# Altium PCB Sheer1.PcbDoc (part 2 of 2)
Units mil, origin at the board's own origin, x right, y up, seen from the top; angles counter-clockwise.
Board outline 7637.8 x 3799.21 mil, 2 copper layers (Top Layer, Bottom Layer); 236 components, 181 nets, 723 pads, 138 vias.
Unrouted connection lines stored in the file: 215.
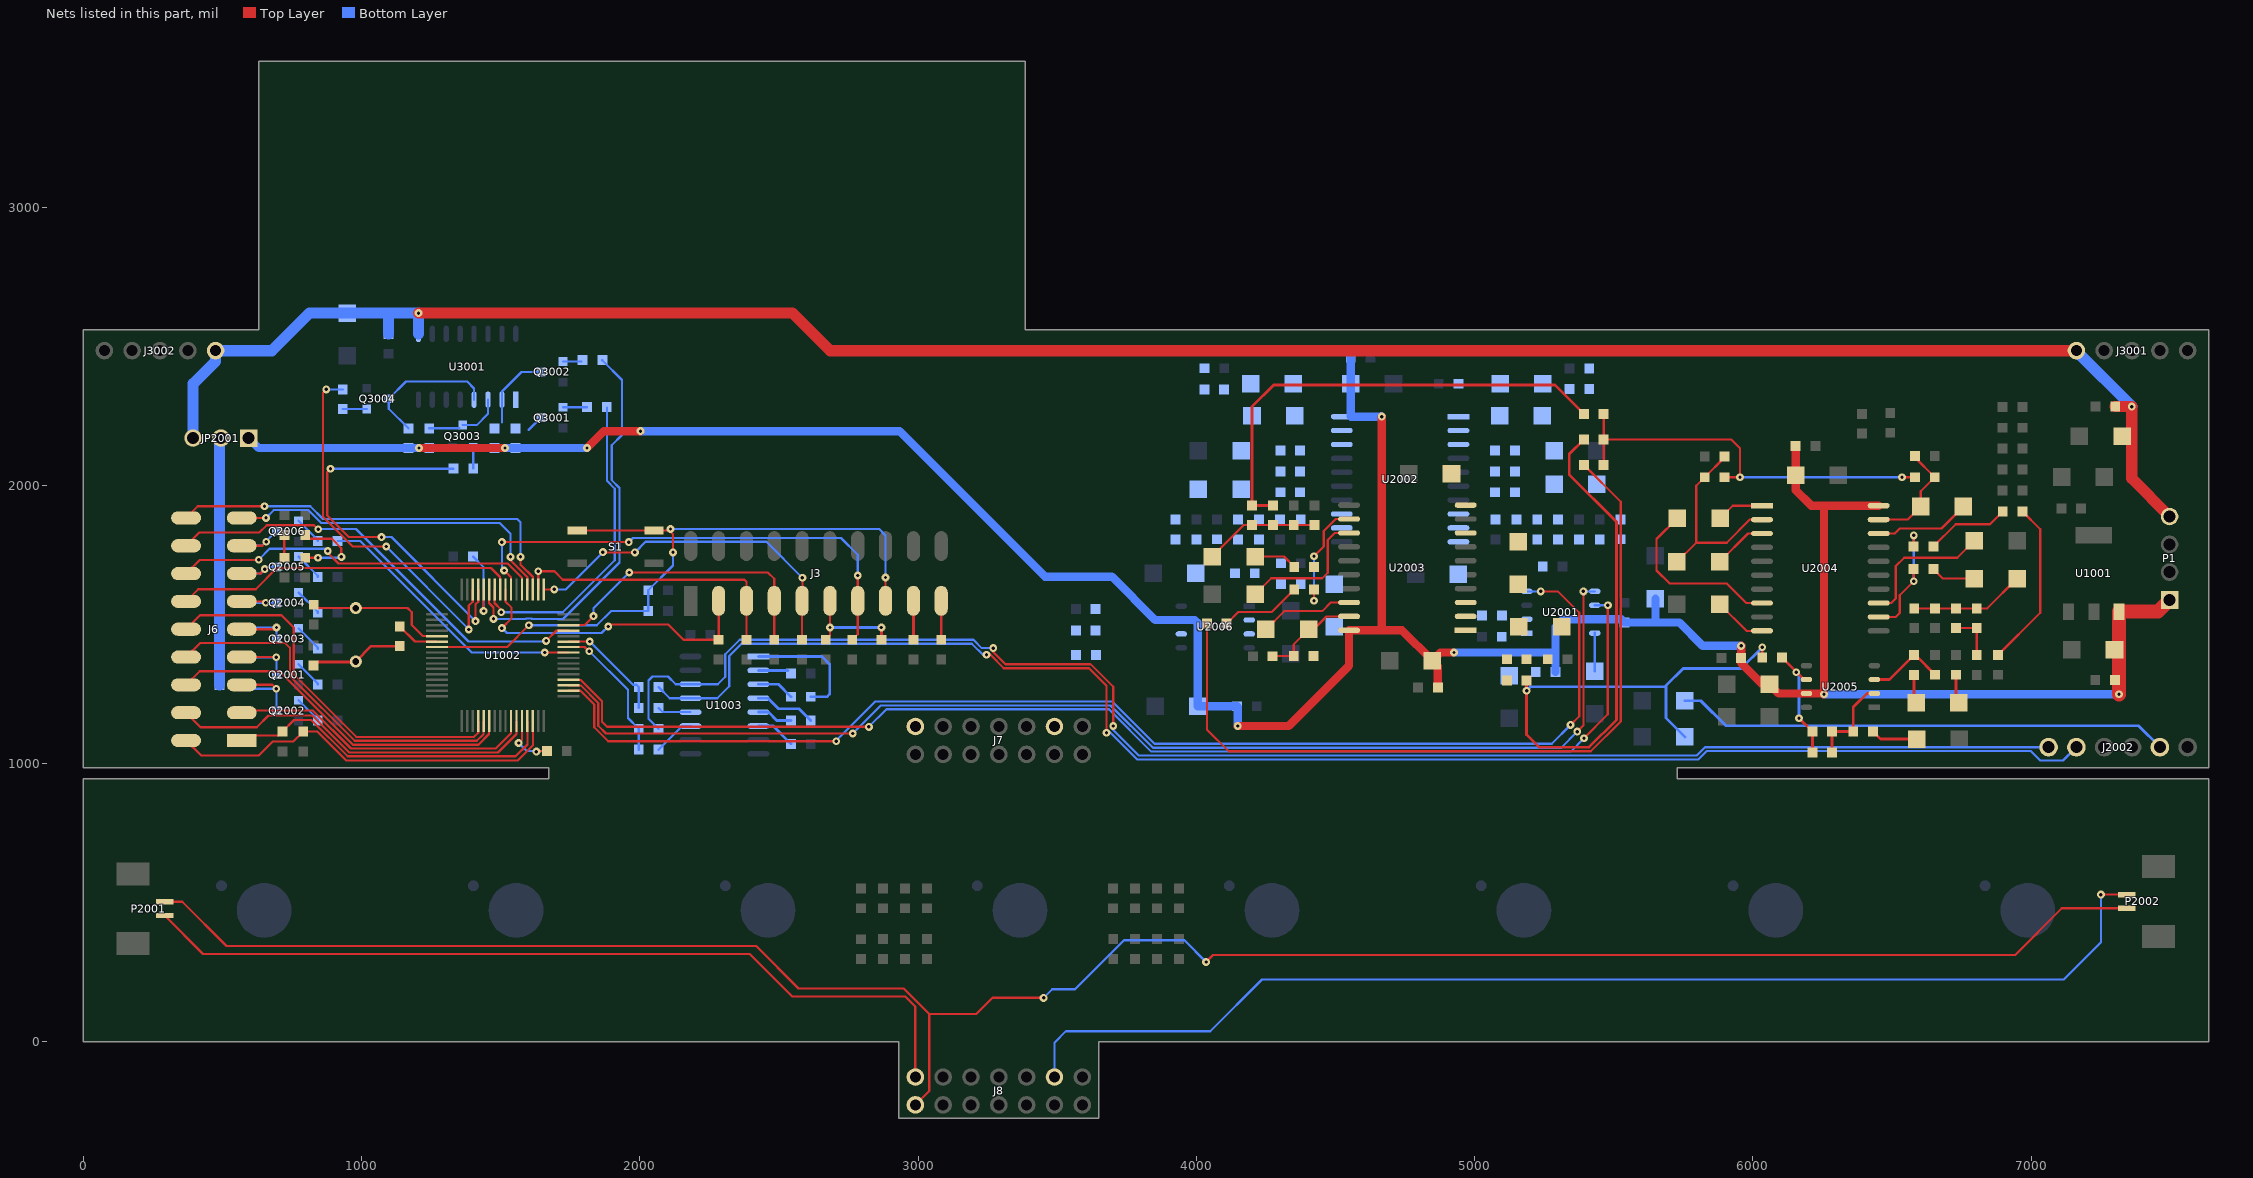
[diagram p2: the nets of this part, all layers, seen from the top]

## Via types
v1: diameter 28, hole 12, Top Layer to Bottom Layer, 130 vias
v2: diameter 19.68, hole 9.84, Top Layer to Bottom Layer, 8 vias

## Nets (pads, with @x,y where several pads share a name; then routed paths per layer and width w, separated by ;. In a path a pad name is that pad's centre, name@x,y a point inside that pad or via, vN(x,y) a via of type N, cw(c..) or ccw(c..) an arc to the next point about the centre after c; other vN are vias at no path point) (continued)
LKJ6: R2014.1 U1002.41 | length 996.5
  Top Layer w8: v1(1658.2,1399.2) U1002.41@1743.44,1399.2
  Bottom Layer w8: R2014.1@913,1800 995,1800 1395.8,1399.2 v1(1658.2,1399.2)
NetC17_2: C17.2 U1003.6 | length 143.6
  Bottom Layer w10: U1003.6@2426,1135 2479.13,1135 C17.2@2543.13,1071
NetC1013_1: C1013.1 R1001.1 Y1.2 | length 315.6
  Top Layer w10: 845,1365 977.13,1365 Y1.2@979,1366.87 1034.13,1422 R1001.1@1137,1422
NetC1016_2: C1016.2 U1003.2 | length 106.1
  Bottom Layer w10: U1003.2@2426,1335 C1016.2@2532.13,1335
NetC1018_1: C1018.1 U1003.1 | length 446.7
  Bottom Layer w10: U1003.1@2426,1385 2654,1385 2682,1357 2682,1250 2672,1240 C1018.1@2614,1240
NetC1018_2: C1018.2 U1003.3 | length 135.8
  Bottom Layer w10: U1003.3@2426,1285 2498.13,1285 C1018.2@2543.13,1240
NetC1019_1: C1019.1 U1003.4 | length 221.1
  Bottom Layer w10: U1003.4@2426,1235 2460,1235 2498,1197 2572,1197 C1019.1@2614,1155
NetC1019_2: C1019.2 U1003.5 | length 129.6
  Bottom Layer w10: U1003.5@2426,1185 2462,1185 2492,1155 C1019.2@2543.13,1155
NetC2003_1: C2003.1 R2001.1 R2003.2 U2001.1
NetC2004_1: C2004.1 U2001.8 | length 136.9
  Bottom Layer w10: C2004.1@5432,1331.98 U2001.8@5432,1468.91
NetC2005_1: C2005.1 C2058.2 R2051.2 U2006.6
NetC2008_1: C2008.1 C2009.2 C2010.2 U2002.2
NetC2008_2: C2008.2 J7.2
NetC2009_1: C2009.1 U2002.3
NetC2010_1: C2010.1 R2016.2
NetC2011_1: C2011.1 R2056.2
NetC2012_1: C2012.1 U2002.10
NetC2013_1: C2013.1 R2066.1
NetC2013_2: C2013.2 C2014.2 C2015.2 R2019.2 R2020.2
NetC2015_1: C2015.1 R2020.1 R2068.2
NetC2016_1: C2016.1 R2017.1
NetC2017_1: C2017.1 U2002.18
NetC2017_2: C2017.2 C2018.2 C2019.1 U2002.19
NetC2018_1: C2018.1 R2018.2
NetC2019_2: C2019.2 J7.12
NetC2020_1: C2020.1 J2002.2 | length 1776.2
  Bottom Layer w10: C2020.1@5755.98,1226 5813,1226 5903,1136 7386,1136 J2002.2@7463,1059
NetC2021_1: C2021.1 R2021.1 R2031.1 R2047.2 | length 2832.9
  Top Layer w10: R2021.1@5187,1299 v1(5187,1262) 5187,1104 5232,1059 5411.79,1059 5510,1157.21 5510,1869 5340,2039 5340,2112 R2031.1@5393,2165 ; R2047.2@6034.13,1381 v1(6034.13,1418.13)
  Bottom Layer w10: v1(5187,1262) 5201,1276 5684,1276 ; C2021.1@5755.98,1096 5688,1163.98 5688,1280 5750,1342 5958,1342 v1(6034.13,1418.13)
NetC2022_1: C2022.1 C2024.2 R2022.2 U2003.2
NetC2023_1: C2023.1 C2025.2 R2023.1 U2003.19 | length 356.8
  Top Layer w8: C2023.1@4275,1387 R2023.1@4350,1387 4350,1428.44 C2025.2@4403.56,1482 4421,1482 4468,1529 U2003.19@4548.71,1529
NetC2024_1: C2024.1 U2003.3
NetC2025_1: C2025.1 U2003.18 | length 338.9
  Top Layer w8: C2025.1@4250.02,1482 4316.02,1548 4452,1548 4483,1579 U2003.18@4548.71,1579
NetC2029_1: C2029.1 U2003.8
NetC2029_2: C2029.2 U2003.1
NetC2030_1: C2030.1 U2003.10
NetC2031_1: C2031.1 U2003.13 | length 506.4
  Top Layer w8: C2031.1@4203,1608 C2031.1@4210.98,1608 4268.98,1666 4452,1666 4472,1686 4472,1804 4497,1829 U2003.13@4548.71,1829
NetC2032_1: C2032.1 R2025.1 | length 156.4
  Top Layer w8: C2032.1@4210.98,1744 4315.02,1744 R2025.1@4352.02,1707
NetC2032_2: C2032.2 C2034.2 C2035.2 R2026.2 R2027.2 | length 414.4
  Top Layer w8: C2032.2@4057.44,1744 4170.57,1857.13 R2027.2@4200,1857.13 C2035.2@4275,1857.13 C2034.2@4350,1857.13 R2026.2@4425.02,1857.13
NetC2033_1: C2033.1 R2029.1 | length 2921.3
  Top Layer w8: C2033.1@4038,1503 4038,1122 4116,1044 5418,1044 5525,1151 5525,1941 R2029.1@5393,2073
NetC2033_2: C2033.2 R2024.1 | length 294.1
  Top Layer w8: C2033.2@4108.87,1503 4150.87,1545 4271.02,1545 R2024.1@4352.02,1626
NetC2035_1: C2035.1 R2027.1 R2030.1 | length 1698.4
  Top Layer w10: C2035.1@4275,1928 R2027.1@4200,1928 4200,2283 4278,2361 5289,2361 R2030.1@5393,2257
NetC2036_1: C2036.1 C2038.2 R2032.2 U2004.2 | length 716.5
  Top Layer w8: C2038.2@5727.44,1725 5796.44,1794 ; C2036.1@5898,2099.87 R2032.2@5827.13,2029 5796.44,1998.31 5796.44,1794 ; U2004.2@6033,1877 5989,1877 5906,1794 5796.44,1794
NetC2037_1: C2037.1 C2039.2 R2034.1 U2004.19 | length 402
  Top Layer w8: U2004.19@6452.29,1877 6556.44,1877 C2039.2@6603.44,1924 6603.44,1978.44 R2034.1@6654,2029 6583,2100 C2037.1@6583,2105
NetC2038_1: C2038.1 U2004.3 | length 194.3
  Top Layer w8: C2038.1@5880.98,1725 5982.98,1827 U2004.3@6033,1827
NetC2039_1: C2039.1 U2004.18 | length 344.9
  Top Layer w8: U2004.18@6452.29,1827 6510,1827 6528,1845 6677.98,1845 C2039.1@6756.98,1924
NetC2042_1: C2042.1 U2004.8 | length 646.5
  Top Layer w8: C2042.1@5729.02,1882 5654,1806.98 5654,1694 5701,1647 5906,1647 5976,1577 U2004.8@6033,1577
NetC2042_2: C2042.2 U2004.1 | length 169.1
  Top Layer w8: C2042.2@5882.56,1882 5927.56,1927 U2004.1@6033,1927
NetC2043_1: C2043.1 U2004.10 | length 191.8
  Top Layer w8: C2043.1@5880.98,1573 5976.98,1477 U2004.10@6033,1477
NetC2044_1: C2044.1 U2004.13 | length 505
  Top Layer w8: U2004.13@6452.29,1577 6498,1577 6514,1593 6514,1710 6544,1740 6735.02,1740 C2044.1@6796.02,1801
NetC2045_1: C2045.1 R2040.1 | length 605.5
  Top Layer w8: R2040.1@6881,1390 7033,1542 7033,1842 C2045.1@6969,1906
NetC2045_2: C2045.2 R2035.1 | length 301.3
  Top Layer w8: R2035.1@6649,1780 6729,1860 6852.13,1860 C2045.2@6898.13,1906
NetC2046_1: C2046.1 R2036.1 | length 161.1
  Top Layer w8: R2036.1@6649,1699 6683,1665 C2046.1@6796.02,1665
NetC2046_2: C2046.2 C2047.2 C2048.2 R2037.2 R2038.2 | length 413.9
  Top Layer w8: R2037.2@6580,1557.87 C2047.2@6655,1557.87 C2048.2@6730,1557.87 R2038.2@6805,1557.87 6842.43,1557.87 C2046.2@6949.56,1665
NetC2048_1: C2048.1 R2038.1 R2039.2 | length 172.1
  Top Layer w8: C2048.1@6730,1487 R2038.1@6805,1487 R2039.2@6805,1389.87
NetC2049_1: C2049.1 R2041.2 | length 90.1
  Top Layer w10: C2049.1@6730,1228.98 R2041.2@6730,1319.13
NetC2049_2: C2049.2 R2042.1 | length 104.5
  Top Layer w10: R2042.1@6579,1319 6579,1226.44 C2049.2@6587.44,1218
NetC2050_1: C2050.1 R2044.1 | length 168.2
  Top Layer w10: R2044.1@6432,1115 6459,1088 C2050.1@6589.02,1088
NetC2053_1: C2053.1 R2044.2 R2046.1 U2005.2 | length 335.4
  Top Layer w10: C2053.1@6285,1040 R2046.1@6285,1115 R2044.2@6361.13,1115 6361.13,1203.13 6410,1252 U2005.2@6437,1252
NetC2053_2: C2053.2 R2046.2 R2047.1 U2005.6 | length 433.9
  Top Layer w10: R2047.1@6105,1381 6184,1302 U2005.6@6192.91,1302 ; v1(6166.13,1163) R2046.2@6214.13,1115 C2053.2@6214.13,1040
  Bottom Layer w10: v1(6156,1328) 6158,1328 6166.13,1319.87 v1(6166.13,1163)
NetC2058_1: C2058.1 R2049.2 R2051.1 U2006.2
NetC2059_1: C2059.1 R2053.2
NetC2059_2: C2059.2 R2048.1
NetC2060_1: C2060.1 R2049.1
NetC2062_1: C2062.1 R2057.1 R2063.1
NetC2062_2: C2062.2 C2063.2 C2064.2 R2057.2 R2058.2
NetC2064_1: C2064.1 R2062.2
NetC2066_1: C2066.1 R2061.2
NetC2066_2: C2066.2 R2064.1
NetC2067_1: C2067.1 R2067.1
NetC2067_2: C2067.2 R2065.1
NetD1_1: D1.1 R1012.2 | length 283.9
  Top Layer w8: R1012.2@797,1739.87 v1(842.87,1739.87) ; 815,1808 893,1808 927,1774 v1(927,1743)
  Bottom Layer w8: v1(842.87,1739.87) v1@923.87,1739.87
NetD2_1: D2.1 R1013.2 | length 82.1
  Top Layer w10: R1013.2@722,1739.87 D2.1@722,1822
NetJ3_11: J3.11 R1007.1 R1008.2 | length 354.1
  Top Layer w8: R1007.1@2683,1460 v1(2683,1489) J3.11@2683,1585
  Top Layer w10: R1008.2@2868,1444.87 v1(2868,1489)
  Bottom Layer w10: v1(2683,1489) v1(2868,1489)
NetJ3_17: J3.17 R1010.2 | length 140.1
  Top Layer w10: R1010.2@2983,1444.87 J3.17@2983,1585
NetJ3_19: J3.19 R1011.2 | length 140.1
  Top Layer w10: R1011.2@3083,1444.87 J3.19@3083,1585
NetJ6_5: J6.5 Q2002.3 R2007.1 | length 326.7
  Top Layer w8: J6.5@569,1283 679,1283 v1(693,1269)
  Bottom Layer w8: R2007.1@574,1269 v1(693,1269) ; Q2002.3@693.47,1190.6 v1@693.47,1268.53
NetJ6_7: J6.7 Q2001.3 R2005.2 | length 318.1
  Top Layer w8: J6.7@569,1383 v1@692,1383
  Bottom Layer w8: R2005.2@560.34,1381.53 693.47,1381.53 Q2001.3@693.47,1319.6
  other v1: 693,1382
NetJ6_9: J6.9 Q2003.3 R2009.1 | length 286.9
  Top Layer w8: J6.9@569,1483 v1@688,1483
  Bottom Layer w8: R2009.1@566,1489 v1(694,1489) ; Q2003.3@693.47,1448.6 v1@693.47,1488.47
NetJ6_11: J6.11 Q2004.3 R2011.1 | length 209.1
  Top Layer w8: J6.11@569,1583 v1@650,1583
  Bottom Layer w8: R2011.1@565.4,1577.6 Q2004.3@693.47,1577.6
  other v1: 655,1578
NetJ6_13: J6.13 Q2005.3 R2013.1 | length 232.9
  Top Layer w8: J6.13@569,1683 636,1683 v1(652,1699)
  Bottom Layer w8: R2013.1@560,1683 636,1683 v1(652,1699) 659.6,1706.6 Q2005.3@693.47,1706.6
NetJ6_15: J6.15 Q2006.3 R2015.1 | length 251.2
  Top Layer w8: J6.15@569,1783 643,1783 v1(657,1797)
  Bottom Layer w8: R2015.1@560,1783 640.87,1783 Q2006.3@693.47,1835.6 Q2006.3@693.47,1833.47
NetJ8_1: J8.1 P2001.2 P2002.2 | length 7788.2
  Top Layer w8: P2001.2@292,503.21 354.79,503.21 514,344 2418.4,344 2570.4,192 2948,192 3040,100 ; J8.1@2990,-226.57 3040,-176.57 3040,100 ; v1(3451,158) 3267,158 3209,100 3040,100 ; v1(4035,287) 4060,312 6942.81,312 7110.6,479.79 P2002.2@7344,479.79
  Bottom Layer w8: v1(3451,158) 3482,189 3563.6,189 3739.6,365 3957,365 v1(4035,287)
NetJ8_2: J8.2 P2001.1 | length 3087
  Top Layer w8: P2001.1@292,454 430,316 2395,316 2548,163 2954,163 2990,127 J8.2@2990,-126.57
NetJ8_12: J8.12 P2002.1 | length 4298.7
  Top Layer w8: v1(7251,529) P2002.1@7344,529
  Bottom Layer w8: J8.12@3490,-126.57 3490,-3 3531,38 4050,38 4236,224 7118,224 7251,357 v1(7251,529)
NetJ2002_5: J2002.5 R1014.2 U1003.13 | length 5578.1
  Top Layer w8: v1(3245.93,1390.93) 3260.07,1390.93 3308,1343 3614.2,1343 3677.03,1280.17 v1(3677.03,1111.03)
  Bottom Layer w8: R1014.2@2066.87,1275 2106.87,1235 U1003.13@2181.98,1235 2278,1235 2321,1278 2321,1387 2365,1431 3193,1431 3233.07,1390.93 v1(3245.93,1390.93) ; v1(3677.03,1111.03) 3680.1,1114.1 3688.1,1114.1 3787.2,1015 5804,1015 5834,1045 6999,1045 7033,1011 7115,1011 J2002.5@7163,1059
NetJ2002_6: J2002.6 R1015.2 U1003.14 | length 5638.2
  Top Layer w8: v1(3269.97,1414.97) 3269.97,1400.83 3313.8,1357 3620,1357 3701.07,1275.93 v1(3701.07,1135.07)
  Bottom Layer w8: R1015.2@2066.87,1125 2031,1160.87 2031,1299 2045,1313 2101,1313 2129,1285 U1003.14@2181.98,1285 2280,1285 2307,1312 2307,1392.8 2359.2,1445 3198.8,1445 3228.83,1414.97 v1(3269.97,1414.97) ; v1(3701.07,1135.07) 3698,1132 3698,1124 3793,1029 5798.2,1029 5828.2,1059 J2002.6@7063,1059
NetJP2001_2: JP2001.2 R2005.1 R2007.2 R2009.2 R2011.2 R2013.2 R2015.2 | length 882.1
  Bottom Layer w40: R2007.2@489.13,1283 R2009.2@489.13,1483 R2011.2@489.13,1583 R2013.2@489.13,1683 R2015.2@489.13,1783 JP2001.2@489.13,2165.13
NetQ2001_1: Q2001.1 R2004.2 | length 101.6
  Bottom Layer w8: Q2001.1@773,1357 842.13,1287.87 R2004.2@842.13,1284
NetQ2002_1: Q2002.1 R2006.2 | length 101.6
  Bottom Layer w8: Q2002.1@773,1228 842.13,1158.87 R2006.2@842.13,1155
NetQ2003_1: Q2003.1 R2008.2 | length 101.6
  Bottom Layer w8: Q2003.1@773,1486 842.13,1416.87 R2008.2@842.13,1413
NetQ2004_1: Q2004.1 R2010.2 | length 101.6
  Bottom Layer w8: Q2004.1@773,1615 842.13,1545.87 R2010.2@842.13,1542
NetQ2005_1: Q2005.1 R2012.2 | length 101.6
  Bottom Layer w8: Q2005.1@773,1744 842.13,1674.87 R2012.2@842.13,1671
NetQ2006_1: Q2006.1 R2014.2 | length 101.6
  Bottom Layer w8: Q2006.1@773,1873 842.13,1803.87 R2014.2@842.13,1800
NetQ3001_1: Q3001.1 R3001.2 | length 86.1
  Bottom Layer w8: Q3001.1@1724,2281 R3001.2@1810.13,2281
NetQ3001_3: Q3001.3 R3006.2 U3001.1 | length 63.3
  Bottom Layer w8: 1599.74,2198.87 Q3001.3@1644.47,2243.6
NetQ3002_1: Q3002.1 R3002.2 | length 65.1
  Bottom Layer w8: Q3002.1@1724,2445 R3002.2@1789.13,2445
NetQ3002_3: Q3002.3 R3007.1 U3001.2 | length 280.7
  Bottom Layer w8: 1504,2226 U3001.2@1504,2308 1504,2337 1574.6,2407.6 Q3002.3@1644.47,2407.6
NetQ3003_1: Q3003.1 R3004.2 | length 76.9
  Bottom Layer w8: R3004.2@1401,2060.13 Q3003.1@1401,2137
NetQ3003_3: Q3003.3 R3008.1 U3001.3 | length 267.2
  Bottom Layer w8: R3008.1@1243,2205 Q3003.3@1352.07,2205 ; Q3003.3@1363.6,2216.53 1413.53,2216.53 1454,2257 U3001.3@1454,2308
NetQ3004_1: Q3004.1 R3005.2 | length 85.9
  Bottom Layer w8: R3005.2@932,2274.13 Q3004.1@1017.87,2274.13
NetQ3004_3: Q3004.3 R3009.1 U3001.4 | length 517.9
  Bottom Layer w8: R3009.1@1168,2205 1097.53,2275.47 Q3004.3@1097.53,2311.4 1159.13,2373 1379,2373 1404,2348 U3001.4@1404,2308
NetR1024_1: R1024.1 U1002.28 | length 199.8
  Top Layer w8: v1(1564,1074) 1576.12,1086.12 U1002.28@1576.12,1153.14 ; v1(1628,1043) 1630,1045 R1024.1@1666,1045
  Bottom Layer w8: v1(1564,1074) 1593,1045 1626,1045 v1(1628,1043)
NetR1027_2: R1027.2 U1002.60 | length 288.8
  Top Layer w8: v1(1438.32,1548.32) U1002.60@1438.32,1625.58
  Bottom Layer w8: R1027.2@1400,1744 1438.32,1705.68 v1(1438.32,1548.32)
NetR1028_2: R1028.2 U1003.11 | length 150.3
  Bottom Layer w8: R1028.2@2066.87,1050 2151.87,1135 U1003.11@2181.98,1135
NetR1029_2: R1029.2 U1003.12 | length 121.3
  Bottom Layer w8: R1029.2@2066.87,1200 2081.87,1185 U1003.12@2181.98,1185
NetR2017_2: R2017.2 U2002.13
NetR2021_2: R2021.2 R2022.1 R2023.2
NetR2024_2: R2024.2 R2025.2 U2003.12 | length 414.8
  Top Layer w8: v1(4422.88,1585.12) R2024.2@4422.88,1626 ; v1(4422.88,1744.88) 4458,1780 4458,1836 4501,1879 U2003.12@4548.71,1879
  Bottom Layer w8: v1(4422.88,1585.12) v1(4422.88,1744.88)
NetR2029_2: R2029.2 R2030.2 R2031.2 R2032.1 R2034.2 | length 1476.5
  Top Layer w8: R2029.2@5463.87,2073 R2031.2@5463.87,2165 ; R2030.2@5463.87,2257 R2031.2@5463.87,2165 ; R2032.1@5898,2029 v1(5954,2029) 5954,2133 5922,2165 R2031.2@5463.87,2165 ; v1(6536,2029) R2034.2@6583.13,2029
  Bottom Layer w8: v1(5954,2029) v1(6536,2029)
NetR2035_2: R2035.2 R2036.2 U2004.12 | length 465.4
  Top Layer w8: U2004.12@6452.29,1527 6514,1527 6528,1541 6528,1605 v1(6578.13,1655.13) R2036.2@6578.13,1699 ; R2035.2@6578.13,1780 v1(6578.13,1820.13)
  Bottom Layer w8: v1(6578.13,1655.13) v1(6578.13,1820.13)
NetR2042_2: R2042.2 R2043.2 U2005.3 | length 278.4
  Top Layer w10: U2005.3@6437,1302 6491.13,1302 R2042.2@6579,1389.87 ; R2042.2@6584.27,1389.87 R2043.2@6655,1319.13
NetR2048_2: R2048.2 R2052.2 U2006.3
NetR2053_1: R2053.1 R2054.1 U2001.2
NetR2055_2: R2055.2 U2002.1
NetR2056_1: R2056.1 U2002.8
NetR2061_1: R2061.1 R2062.1 U2002.9
NetR2065_2: R2065.2 R2066.2 U2002.12
NetR3001_1: R3001.1 U1002.58 | length 1128.6
  Top Layer w8: U1002.58@1477.69,1625.58 1477.69,1577.11 v1@1502,1552.8
  Bottom Layer w8: v1(1502,1544) 1723,1544 1910,1731 1910,1988 1882.2,2015.8 R3001.1@1882.2,2279.8
NetR3002_1: R3002.1 U1002.59 | length 1433.5
  Top Layer w8: U1002.59@1458.01,1625.58 1458.01,1576.99 1474,1561 v1(1474,1520)
  Bottom Layer w8: v1(1474,1520) 1590.06,1520 1591.06,1521 1610.94,1521 1611.94,1520 1724,1520 1927,1723 1927,1990.8 1899,2018.8 1899,2144 1936,2181 1936,2379 R3002.1@1865,2450
NetR3004_1: R3004.1 U1002.61 | length 1431.7
  Top Layer w8: v1(888,2060) 876,2048 876,1892 954,1814 v1(1071,1814) v1@1071,1805.2 ; v1(1409,1512) 1409,1572.2 1418.64,1581.84 U1002.61@1418.64,1625.58
  Bottom Layer w8: v1(888,2060) R3004.1@1330,2060 ; v1(1071,1814) 1107,1814 v1(1409,1512)
NetR3005_1: R3005.1 U1002.62 | length 1363.6
  Top Layer w8: v1(873,2345) 861,2333 861,1887.2 968.2,1780 v1(1088,1780) ; v1(1385,1482) 1385,1568 1398.95,1581.95 U1002.62@1398.95,1625.58
  Bottom Layer w8: v1(873,2345) R3005.1@932,2345 ; v1(1088,1780) 1385,1483 v1(1385,1482)
NetU1002_34: U1002.34 U2001.4 | length 4512.5
  Top Layer w8: U1002.34@1743.44,1261.41 1786.81,1261.41 1836,1212.22 1836,1130.36 1886.36,1080 v1(2706,1080) ; v1(5238,1619) 5299,1619 5376,1542 5376,1170 v1(5345,1139)
  Bottom Layer w8: v1(2706,1080) 2706,1082.94 2846.06,1223 3697.6,1223 3849.6,1071 5277,1071 v1(5345,1139) ; U2001.4@5188,1619 v1(5238,1619)
NetU1002_35: U1002.35 U2001.5 | length 4428.3
  Top Layer w8: U1002.35@1743.44,1281.09 1786.92,1281.09 1850,1218.02 1850,1136.16 1878.16,1108 v1(2765,1108) ; v1(5369.04,1114.96) 5391,1136.92 v1(5391,1619)
  Bottom Layer w8: v1(2765,1108) 2866,1209 3691.8,1209 3843.8,1057 5311.08,1057 v1(5369.04,1114.96) ; v1(5391,1619) U2001.5@5432.09,1619
NetU1002_36: U1002.36 U2001.6 | length 4427.3
  Top Layer w8: U1002.36@1743.44,1300.78 1787.04,1300.78 1864,1223.82 1864,1150 1882,1132 v1@2818,1132 ; v1(5393.08,1090.92) 5479,1176.83 v1(5479,1569)
  Bottom Layer w8: v1(2823,1132) 2886,1195 3686,1195 3838,1043 5345.17,1043 v1(5393.08,1090.92) ; U2001.6@5432.09,1569 v1(5479,1569)
OSCI: C1012.1 U1002.5 Y1.1 | length 499.7
  Top Layer w8: C1012.1@840,1559 Y1.1@979,1559 1165,1559 1180,1544 1180,1498 1219.74,1458.26 U1002.5@1271,1458.26
OSCO: R1001.2 U1002.6 | length 156.5
  Top Layer w8: R1001.2@1137,1492.87 1191.29,1438.57 U1002.6@1271,1438.57
PA4: J6.10 U1002.20 | length 1398.6
  Top Layer w8: J6.10@369,1483 419,1533 712,1533 756,1489 756,1320.6 980.6,1096 1404,1096 1418.64,1110.64 U1002.20@1418.64,1153.14
PA5: J6.8 U1002.21 | length 1351.6
  Top Layer w8: J6.8@369,1383 419,1433 725,1433 742,1416 742,1314.8 974.8,1082 1414,1082 1438.32,1106.32 U1002.21@1438.32,1153.14
PA6: J6.6 U1002.22 | length 1281.4
  Top Layer w8: J6.6@369,1283 418,1332 705,1332 969,1068 1419.8,1068 1458.01,1106.21 U1002.22@1458.01,1153.14
PA12: J6.16 U1002.45 | length 1595.2
  Top Layer w8: J6.16@369,1783 417,1831 633,1831 659,1857 829,1857 v1(844,1842) ; v1(1663,1441) 1699.94,1477.95 U1002.45@1743.44,1477.95
  Bottom Layer w8: v1(844,1842) 845,1843 980,1843 1384,1439 1661,1439 v1(1663,1441)
PA13: J3.7 R1005.1 U1002.46 | length 1048.9
  Top Layer w8: U1002.46@1743.44,1497.63 1800.63,1497.63 v1(1833,1530) ; 1976,1687 2460,1687 2483,1664 J3.7@2483,1585 R1005.1@2483,1445
  Bottom Layer w8: v1(1833,1530) 1833,1558 v1(1962,1687)
PA14: J3.9 R1009.2 U1002.49 | length 1276.5
  Top Layer w8: U1002.49@1655.27,1626 v1(1692,1626) v1@1691.58,1625.58 ; v1(1867,1760) 1868,1759 v1(1982,1759) ; R1009.2@2583,1444.87 J3.9@2583,1585 ; J3.9@2584,1586 v1(2584,1668)
  Bottom Layer w8: v1(1692,1626) 1733,1626 v1(1867,1760) ; v1(1982,1759) 2020,1797 2455,1797 v1(2584,1668)
PA15: J3.5 R1004.1 U1002.50 | length 1037.8
  Top Layer w8: U1002.50@1635.17,1625.58 1635,1625.76 v1(1635,1691) 1693,1691 1723,1661 2376,1661 2383,1654 J3.5@2383,1585 R1004.1@2383,1445
PB0: J6.3 U1002.26 | length 1094.9
  Top Layer w8: J6.3@569,1183 577,1191 824.4,1191 961.4,1054 1482,1054 1536.75,1108.75 U1002.26@1536.75,1153.14
PB1: J6.4 U1002.27 | length 1355.7
  Top Layer w8: J6.4@369,1183 421,1131 623,1131 665,1173 822.6,1173 955.6,1040 1490,1040 1556.43,1106.43 U1002.27@1556.43,1153.14
PB3: J3.13 R1006.1 U1002.55 | length 1814.2
  Top Layer w8: v1(1504,1796) v1(1960,1796) ; v1@1512,1688.49 v1(1512,1694) 1536.75,1669.25 U1002.55@1536.75,1625.58 U1002.55@1537,1625.84 ; R1006.1@2763,1445 2783,1465 J3.13@2783,1585 v1(2783,1676)
  Bottom Layer w8: v1(1504,1796) 1504,1702 v1(1512,1694) ; v1(1960,1796) 1975,1811 2723,1811 2783,1751 v1(2783,1676)
PB4: J3.3 R1003.1 U1002.56 | length 1174.2
  Top Layer w8: v1(1504,1487) 1539,1522 1539,1560 1517.06,1581.94 U1002.56@1517.06,1625.58 ; v1(1886,1493) 1893,1500 2102,1500 2157,1445 R1003.1@2283,1445 J3.3@2283,1585 J3.3@2283,1635
  Bottom Layer w8: v1(1504,1487) 1522,1469 1862,1469 v1(1886,1493)
PB5: J6.12 U1002.57 | length 1236.5
  Top Layer w8: J6.12@369,1583 413,1627 619,1627 695,1703 1465,1703 1497.38,1670.62 U1002.57@1497.38,1625.58
PB10: J6.1 R1025.2 U1002.29 | length 1188.3
  Top Layer w8: J6.1@587,1101 701.13,1101 R1025.2@715,1114.87 757.13,1157 818.8,1157 949.8,1026 1553,1026 1595.8,1068.8 U1002.29@1595.8,1153.14
PB11: J6.2 R1026.2 U1002.30 | length 1457.7
  Top Layer w8: J6.2@369,1083 423,1029 630,1029 680,1079 754.13,1079 R1026.2@790,1114.87 841.13,1114.87 945,1011 1561,1011 1615.49,1065.49 U1002.30@1615.49,1153.14
PC10: J6.18 U1002.51 | length 1503.3
  Top Layer w8: J6.18@369,1883 411,1925 v1(651,1925) ; v1(1571,1743) 1571,1715 1615.49,1670.51 U1002.51@1615.49,1625.58
  Bottom Layer w8: v1(651,1925) 814.8,1925 860.8,1879 1559,1879 1571,1867 v1(1571,1743)
PC11: J6.17 U1002.52 | length 1238.4
  Top Layer w8: J6.17@569,1883 v1(656,1883) ; v1(1535,1743) 1535,1731 1595.8,1670.2 U1002.52@1595.8,1625.58
  Bottom Layer w8: v1(656,1883) 684,1911 809,1911 855,1865 1496,1865 1535,1826 v1(1535,1743)
PC12: J6.14 U1002.53 | length 1332.9
  Top Layer w8: J6.14@369,1683 418,1732 629,1732 v1(630,1733) ; v1(878,1764) 878,1758.06 917.06,1719 1525,1719 1576.12,1667.88 U1002.53@1576.12,1625.58
  Bottom Layer w8: v1(630,1733) 669,1772 870,1772 v1(878,1764)
RESET: C1014.1 J3.15 R1002.1 S1.1 S1.2 U1002.7 | length 2492.7
  Top Layer w8: U1002.7@1271,1418.89 1522.89,1418.89 v1(1601,1497) ; S1.1@1775,1838 S1.2@2050.59,1838 2105,1838 2119,1824 v1(2119,1759) ; J3.15@2883,1585 v1(2883,1669)
  Bottom Layer w8: v1(1601,1497) 1845,1497 1896,1548 R1002.1@2030,1548 C1014.1@2030,1623 2119,1712 v1(2119,1759) ; v1(2110,1843) 2860,1843 2883,1820 v1(2883,1669)
UART_RXD: R1014.1 R1029.1 U1002.43 | length 395.3
  Top Layer w8: U1002.43@1743.44,1438.57 v1(1819.57,1438.57)
  Bottom Layer w8: v1(1819.57,1438.57) 1975.15,1283 1988,1283 R1014.1@1996,1275 R1029.1@1996,1200
UART_TXD: R1015.1 R1028.1 U1002.42 | length 508.5
  Top Layer w8: U1002.42@1743.44,1418.89 1801.11,1418.89 1816,1404 v1(1818,1404)
  Bottom Layer w8: v1(1818,1404) 1957,1265 1957,1164 R1015.1@1996,1125 R1028.1@1996,1050
VCC-5V: C1003.2 C1004.1 C2001.1 C2002.2 C2006.1 C2007.1 C2026.1 C2028.1 C2040.1 C2041.1 C2052.1 C2054.1 C2055.1 C2056.1 JP2001.1 P1.1 R2001.2 R3006.1 R3007.2 R3008.2 R3009.2 U1001.3 U2001.7 U2002.20 U2003.20 U2004.20 U2005.7 U2006.7 | length 10975.1
  Top Layer w30: v1(1206,2134) v1(1515.07,2134) ; v1(1810,2134) 1871,2195 v1(2002,2195) ; v1(4149,1135) 4332,1135 4548.71,1351.71 U2003.20@4548.71,1479 4666,1479 ; v1(4666,2247) 4666,1479 ; C2028.1@4868,1274 C2026.1@4868,1349.98 ; v1(4926,1399) 4876.98,1399 C2026.1@4847.98,1370 4738.98,1479 4666,1479 ; v1(5958,1423) C2054.1@5958,1380 5958,1362 6035,1285 C2052.1@6059.98,1285 6092.98,1252 U2005.7@6192.91,1252 6253,1252 v1(6256.1,1248.9) 6256.1,1925.1 ; C2041.1@6154,2141 C2040.1@6154.02,2036 6154.02,1982.98 6210,1927 U2004.20@6452.29,1927
  Top Layer w50: v1(7316.1,1248.9) U1001.3@7316.1,1546 7456,1546 P1.1@7498,1588
  Bottom Layer w30: JP2001.1@594,2170 629.87,2134.13 R3009.2@1168,2134.13 R3008.2@1243,2134.13 ; R3007.2@1477.13,2134 v1(1515.07,2134) R3006.1@1553,2134 v1(1810,2134) ; v1(2002,2195) 2933,2195 3456,1672 3696,1672 3852,1516 U2006.7@3945.91,1516 3994,1516 4004.98,1505.02 C2055.1@4004.98,1206 C2056.1@4146,1206 4149,1203 v1(4149,1135) ; U2002.20@4555,2248 C2007.1@4555,2460 ; U2002.20@4556,2247 v1(4666,2247) v1@4665,2248 ; v1(4926,1399) 5290.87,1399 ; R2001.2@5290.87,1329 5290.87,1399 ; C2002.2@5527.13,1519 U2001.7@5432.09,1519 5319,1519 5290.87,1490.87 5290.87,1399 ; C2002.2@5539,1507.13 5650,1507.13 ; C2001.1@5650,1593.02 5650,1507.13 ; v1(5958,1423) 5820.02,1423 5735.88,1507.13 5650,1507.13 ; v1(6256.1,1248.9) v1(7316.1,1248.9)
VCC-12V: C1001.2 C1002.1 C3001.1 C3002.1 J3001.5 J3002.5 JP2001.3 P1.4 U3001.9 | length 8086
  Top Layer w40: v1(1204,2619) 2549,2619 2684,2484 J3001.5@7163,2484 ; C1001.2@7302.87,2283 v1(7362,2283) 7362,2024 P1.4@7498,1888
  Bottom Layer w40: JP2001.3@394,2170 394,2365 475,2446 J3002.5@475,2484 677,2484 811.98,2618.98 C3002.1@949,2618.98 v1(1204,2619) ; C3001.1@1096,2544 1096,2613.98 ; U3001.9@1204,2544.22 v1(1204,2619) ; J3001.5@7163,2484 7163,2482 v1(7362,2283)
pads on no net: P2001.3 P2001.4 P2002.3 P2002.4 U1002.2 U1002.3 U1002.4 U1002.33 U1002.44 U1002.54 U1003.7 U1003.8 U1003.9 U1003.10 U2005.1 U2005.5 U2005.8 U2006.1 U2006.5 U2006.8 U3001.5 U3001.6 U3001.7 U3001.10 U3001.11 U3001.12

## Polygon pours and split planes (outlines as drawn)
GND on Top Layer "Top Layer" (solid, remove dead copper, shelved, pour order 4): -3803.9,-457.44 11441.1,-457.44 11441.1,1402.56 -3803.9,1402.56
GND on Bottom Layer "Bottom Layer" (solid, remove dead copper, shelved, pour order 6): -3803.9,-457.44 11441.1,-457.44 11441.1,1402.56 -3803.9,1402.56

## Keep-outs
Keep-Out Layer:
  circle w3.94: c2007.87,2066.93 r62.99
  circle w3.94: c5629.92,807.09 r62.99
  circle w3.94: c5629.92,137.8 r62.99
  circle w3.94: c7480.32,807.09 r62.99
  circle w3.94: c7480.32,137.8 r62.99
  circle w3.94: c3818.9,137.8 r62.99
  circle w3.94: c3818.9,807.09 r62.99
  circle w3.94: c2007.87,807.09 r62.99
  circle w3.94: c2007.87,137.8 r62.99
  circle w3.94: c157.48,807.09 r62.99
  circle w3.94: c157.48,137.8 r62.99
  circle w3.94: c157.48,1397.64 r62.99
  circle w3.94: c157.48,2066.93 r62.99
  circle w3.94: c2007.87,1397.64 r62.99
  circle w3.94: c7480.32,2066.93 r62.99
  circle w3.94: c5629.92,1397.64 r62.99
  circle w3.94: c5629.92,2066.93 r62.99
  circle w3.94: c7480.32,1397.64 r62.99
  circle w3.94: c3818.9,1397.64 r62.99
  circle w3.94: c3818.9,2066.93 r62.99
  circle w3.94: c3248.03,2066.93 r62.99
  circle w3.94: c748.03,3405.51 r62.99
  lines w3.94: 2930,0 2930,-275.59 3650,-275.59 3650,0 7637.8,0 7637.8,944.88 5728.35,944.88 5728.35,984.25 7637.8,984.25 7637.8,2559.06 3385.83,2559.06 3385.83,3523.62 629.92,3523.62 629.92,2559.06 0,2559.06 0,984.25 1673.23,984.25 1673.23,944.88 0,944.88 0,0 2930,0 ; 2930,0 2930,0 ; 905.51,1909.45 905.51,1948.82 1889.76,1948.82 1889.76,1909.45 905.51,1909.45 ; 1751.97,944.88 1751.97,984.25 3661.42,984.25 3661.42,944.88 1751.97,944.88 ; 2125.98,1909.45 2125.98,1948.82 3110.24,1948.82 3110.24,1909.45 2125.98,1909.45 ; 3740.16,944.88 3740.16,984.25 5649.61,984.25 5649.61,944.88 3740.16,944.88

## Silkscreen, mask and mechanical layers (free items; w line width, h text height)
Top Overlay:
  text "STM32-KEY-1.3" at 6621,834 h60
  text "2017-8-31" at 6710,746 h60